# Altium PCB LED Breakout Board.PcbDoc
Units mil, origin at the board's own origin, x right, y up, seen from the top; angles counter-clockwise.
Board outline 740 x 1400 mil, 2 copper layers (Top Layer, Bottom Layer); 18 components, 17 nets, 56 pads, 0 vias.
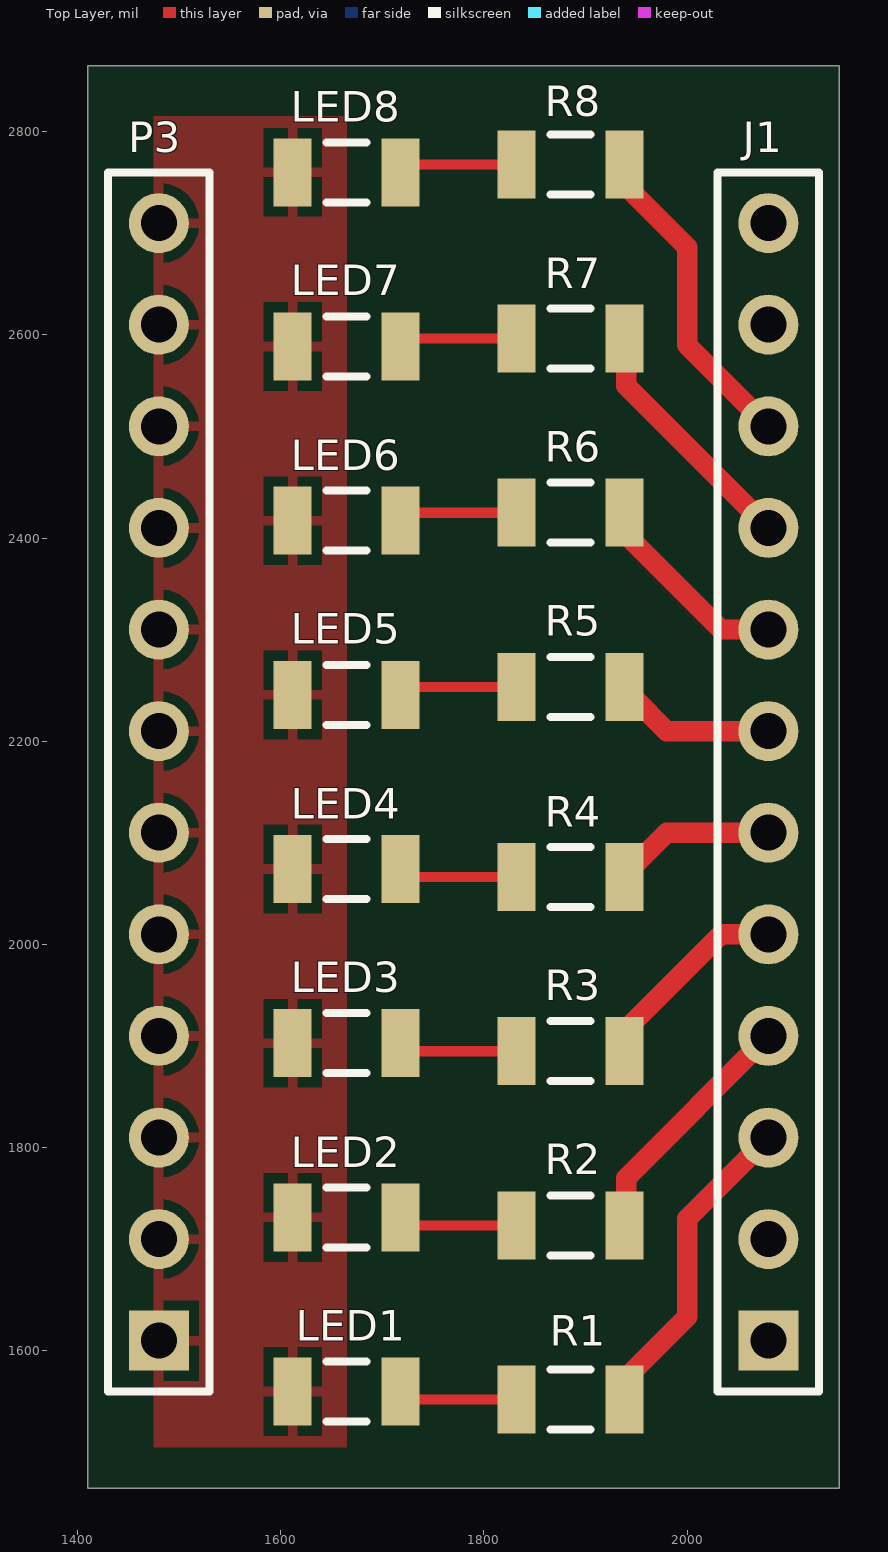
[diagram p0: Top Layer view]
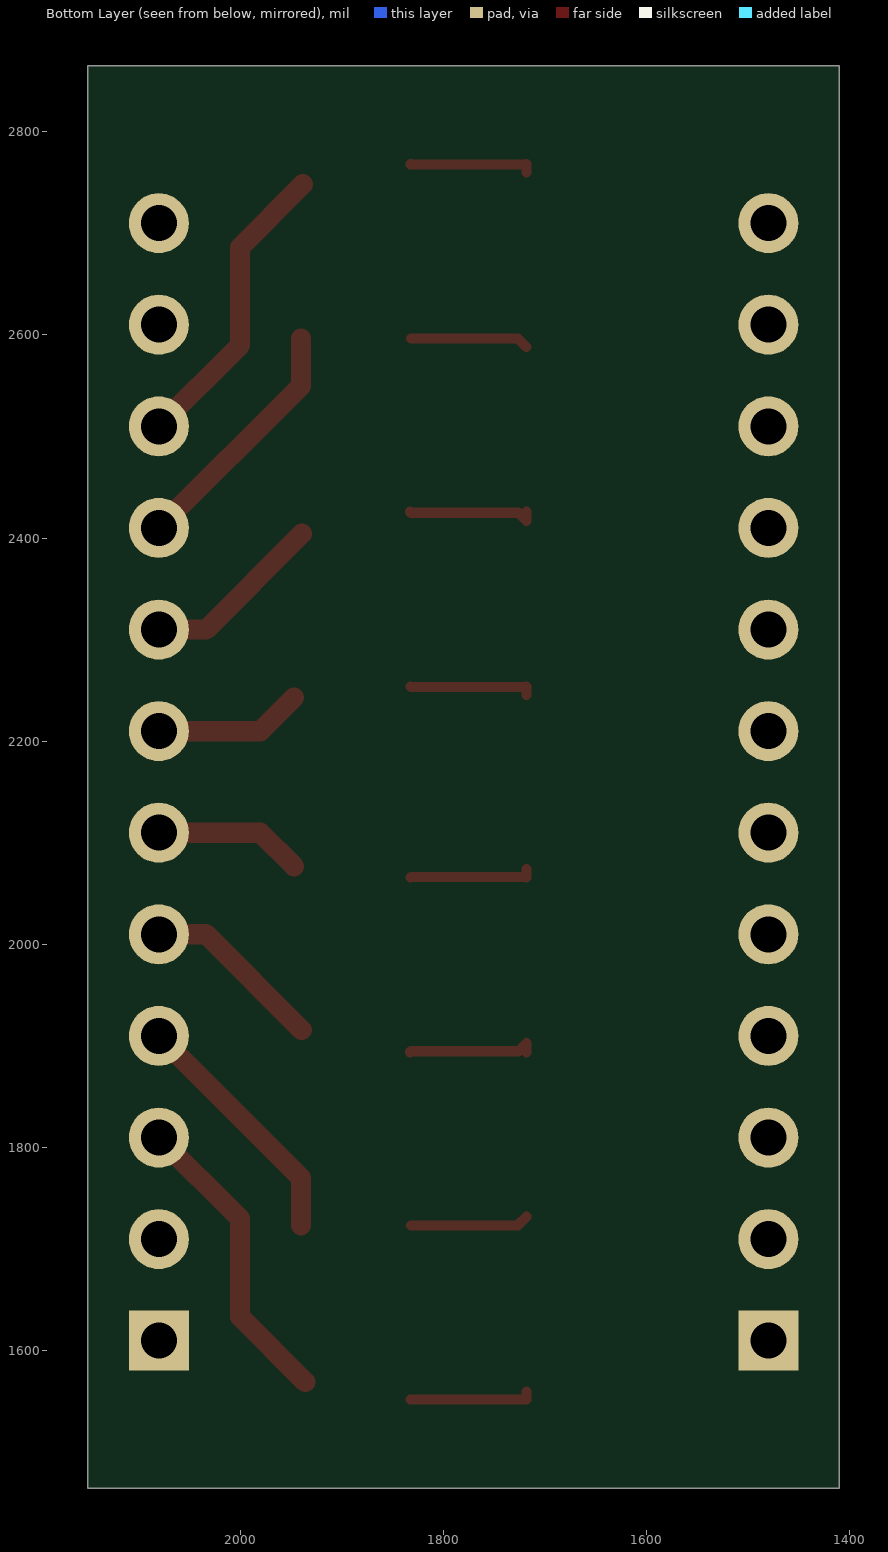
[diagram p1: Bottom Layer view, seen from below]

## Layer stack, top to bottom
Top Layer: signal copper 1.4
Dielectric: dielectric 12.6, FR-4, Dk 4.8
Bottom Layer: signal copper 1.4

## Board outline
1410,1465 1410,2865 2150,2865 2150,1465

## Design rules (kind name [scope] priority, off if disabled: settings)
Clearance [All] p1: gap=10
PolygonConnect [All] p1: connectstyle=Relief reliefconductorwidth=10 reliefentries=4 polygonreliefangle="90 Angle" airgapwidth=10
RoutingVias [All] p1: holewidth=28 width=50 viastyle="Through Hole" minholewidth=28 minwidth=50 maxholewidth=28 maxwidth=50
SolderMaskExpansion [All] p1: expansion=4
Width [All] p1: maxlimit=20 minlimit=7 preferedwidth=10
28 further rules are at their usual default settings.

## Components (designator, comment, footprint, x,y, rotation, side; value= is the part's Value field where it differs from the comment)
J1 "Header 12" HDR1X12 2080,1610 r90 top
LED1 "LED_1206" RESC1206(3216)75_L 1665,1560 r180 top
LED2 "LED_1206" RESC1206(3216)75_L 1665,1731.43 r180 top
LED3 "LED_1206" RESC1206(3216)75_L 1665,1902.86 r180 top
LED4 "LED_1206" RESC1206(3216)75_L 1665,2074.29 r180 top
LED5 "LED_1206" RESC1206(3216)75_L 1665,2245.71 r180 top
LED6 "LED_1206" RESC1206(3216)75_L 1665,2417.14 r180 top
LED7 "LED_1206" RESC1206(3216)75_L 1665,2588.57 r180 top
LED8 "LED_1206" RESC1206(3216)75_L 1665,2760 r180 top
P3 "Header 12" HDR1X12 1480,1610 r90 top
R1 "1206" RESC1206(3216)75_L 1885,1552.13 r0 top
R2 "1206" RESC1206(3216)75_L 1885,1723.55 r0 top
R3 "1206" RESC1206(3216)75_L 1885,1894.98 r0 top
R4 "1206" RESC1206(3216)75_L 1885,2066.41 r0 top
R5 "1206" RESC1206(3216)75_L 1885,2253.59 r0 top
R6 "1206" RESC1206(3216)75_L 1885,2425.02 r0 top
R7 "1206" RESC1206(3216)75_L 1885,2596.44 r0 top
R8 "1206" RESC1206(3216)75_L 1885,2767.87 r0 top

## Footprints (in the part's own frame and the unit in brackets; to place one, negate y for a bottom-side part, rotate by r counter-clockwise, add the part's x,y. Pads: shape width x height; smd on the part's side, far side on the other; paste and mask are expansions set on the pad)
HDR1X12 [mm] "Connector; Header; 12 Position"
  rect 1.5x1.5 hole 0.9: 1(0,0)
  round 1.5 hole 0.9: 2(2.54,0) 3(5.08,0) 4(7.62,0) 5(10.16,0) 6(12.7,0) 7(15.24,0) 8(17.78,0) 9(20.32,0) 10(22.86,0) 11(25.4,0) 12(27.94,0)
  silkscreen extent -1.27,-1.27 29.21,1.27
RESC1206(3216)75_L [mm] "Chip Resistor, Body 3.2x1.6mm, IPC High Density"
  rect 0.95x1.7 smd: 1(-1.35,0) 2(1.35,0)
  silkscreen extent -0.5,-0.75 0.5,0.75, body extent -1.67,-0.87 1.67,0.87, height 0.75

## Part data
J1 P3: "Header, 12-Pin"
LED1 LED2 LED3 LED4 LED5 LED6 LED7 LED8: library part CMP-0201-0036, "GREEN color, 1206, SMD"
R1 R2 R3 R4 R5 R6 R7 R8: library part CMP-0501-0000, "Jumper 0805 (2012 Metric)"

## Nets (pads, with @x,y where several pads share a name; then routed paths per layer and width w, separated by ;. In a path a pad name is that pad's centre, name@x,y a point inside that pad or via, vN(x,y) a via of type N, cw(c..) or ccw(c..) an arc to the next point about the centre after c; other vN are vias at no path point)
GND: LED1.2 LED2.2 LED3.2 LED4.2 LED5.2 LED6.2 LED7.2 LED8.2 P3.1 P3.2 P3.3 P3.4 P3.5 P3.6 P3.7 P3.8 P3.9 P3.10 P3.11 P3.12
NetJ1_3: J1.3 R1.2 | length 300.5
  Top Layer w20: R1.2@1935.67,1569.33 2000,1633.66 2000,1730 J1.3
NetJ1_4: J1.4 R2.2 | length 244.4
  Top Layer w20: R2.2@1940,1723.56 1940,1770 J1.4
NetJ1_5: J1.5 R3.2 | length 179.8
  Top Layer w20: R3.2@1939.24,1915.76 2033.48,2010 J1.5
NetJ1_6: J1.6 R4.2 | length 146.9
  Top Layer w20: R4.2@1946.83,2076.83 1980,2110 J1.6
NetJ1_7: J1.7 R5.2 | length 146.9
  Top Layer w20: R5.2@1946.83,2243.17 1980,2210 J1.7
NetJ1_8: J1.8 R6.2 | length 179.8
  Top Layer w20: R6.2@1939.24,2404.24 2033.48,2310 J1.8
NetJ1_9: J1.9 R7.2 | length 244.4
  Top Layer w20: R7.2@1940,2596.44 1940,2550 J1.9
NetJ1_10: J1.10 R8.2 | length 296.9
  Top Layer w20: R8.2@1938.17,2748.17 2000,2686.34 2000,2590 J1.10
NetLED1_1: LED1.1 R1.1 | length 121.9
  Top Layer w10: LED1.1 1718.15,1552 1718.28,1552.13 1831.85,1552.13 R1.1@1831.98,1552
NetLED2_1: LED2.1 R2.1 | length 117.2
  Top Layer w10: LED2.1@1718.15,1732 1726.59,1723.56 R2.1
NetLED3_1: LED3.1 R3.1 | length 127.2
  Top Layer w10: LED3.1@1718.15,1894 LED3.1 1726.02,1894.98 R3.1 R3.1@1832.83,1894
NetLED4_1: LED4.1 R4.1 | length 122.7
  Top Layer w10: LED4.1 1718.15,2066 1718.56,2066.41 1831.85,2066.41 R4.1@1832.26,2066
NetLED5_1: LED5.1 R5.1 | length 122.7
  Top Layer w10: LED5.1 1718.15,2254 1718.56,2253.59 1831.85,2253.59 R5.1@1832.26,2254
NetLED6_1: LED6.1 R6.1 | length 127.2
  Top Layer w10: LED6.1@1718.15,2426 LED6.1 1726.02,2425.02 R6.1 R6.1@1832.83,2426
NetLED7_1: LED7.1 R7.1 | length 117.2
  Top Layer w10: LED7.1@1718.15,2588 1726.59,2596.44 R7.1
NetLED8_1: LED8.1 R8.1 | length 121.9
  Top Layer w10: LED8.1 1718.15,2768 1718.28,2767.87 1831.85,2767.87 R8.1@1831.98,2768
pads on no net: J1.1 J1.2 J1.11 J1.12

## Polygon pours and split planes (outlines as drawn)
GND on Top Layer "Top Layer-GND" (solid, pour order 8): 1475,2815 1665,2815 1665,1505 1475,1505

## Silkscreen, mask and mechanical layers (free items; w line width, h text height)
Mechanical 2:
  the board outline again, w10